# EAGLE board PIRot (EAGLE 9.6.0)
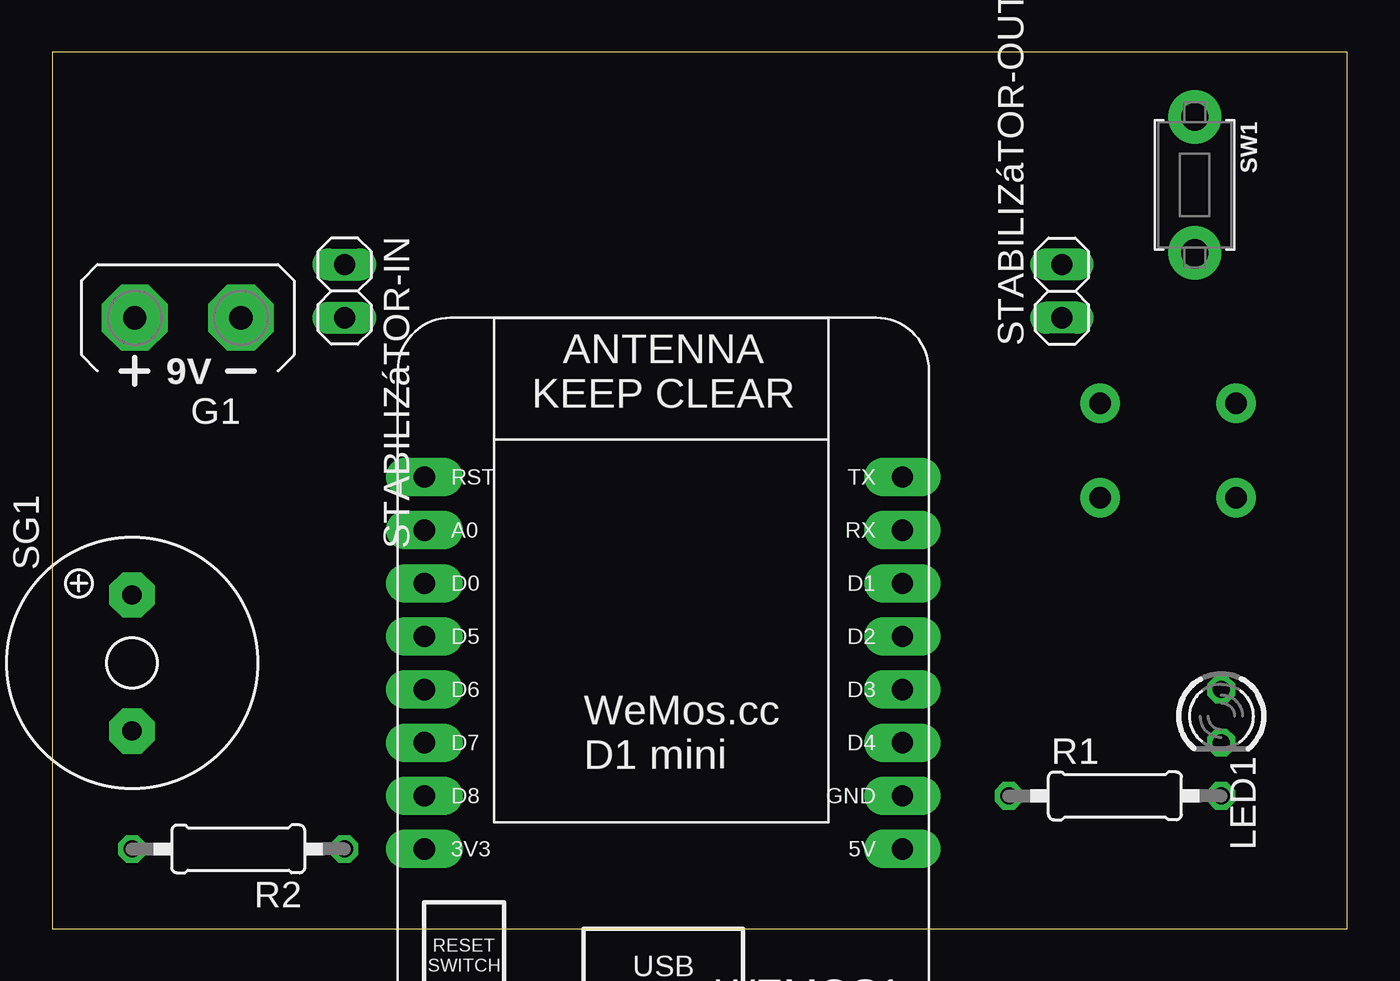
[diagram p0: board, top side]
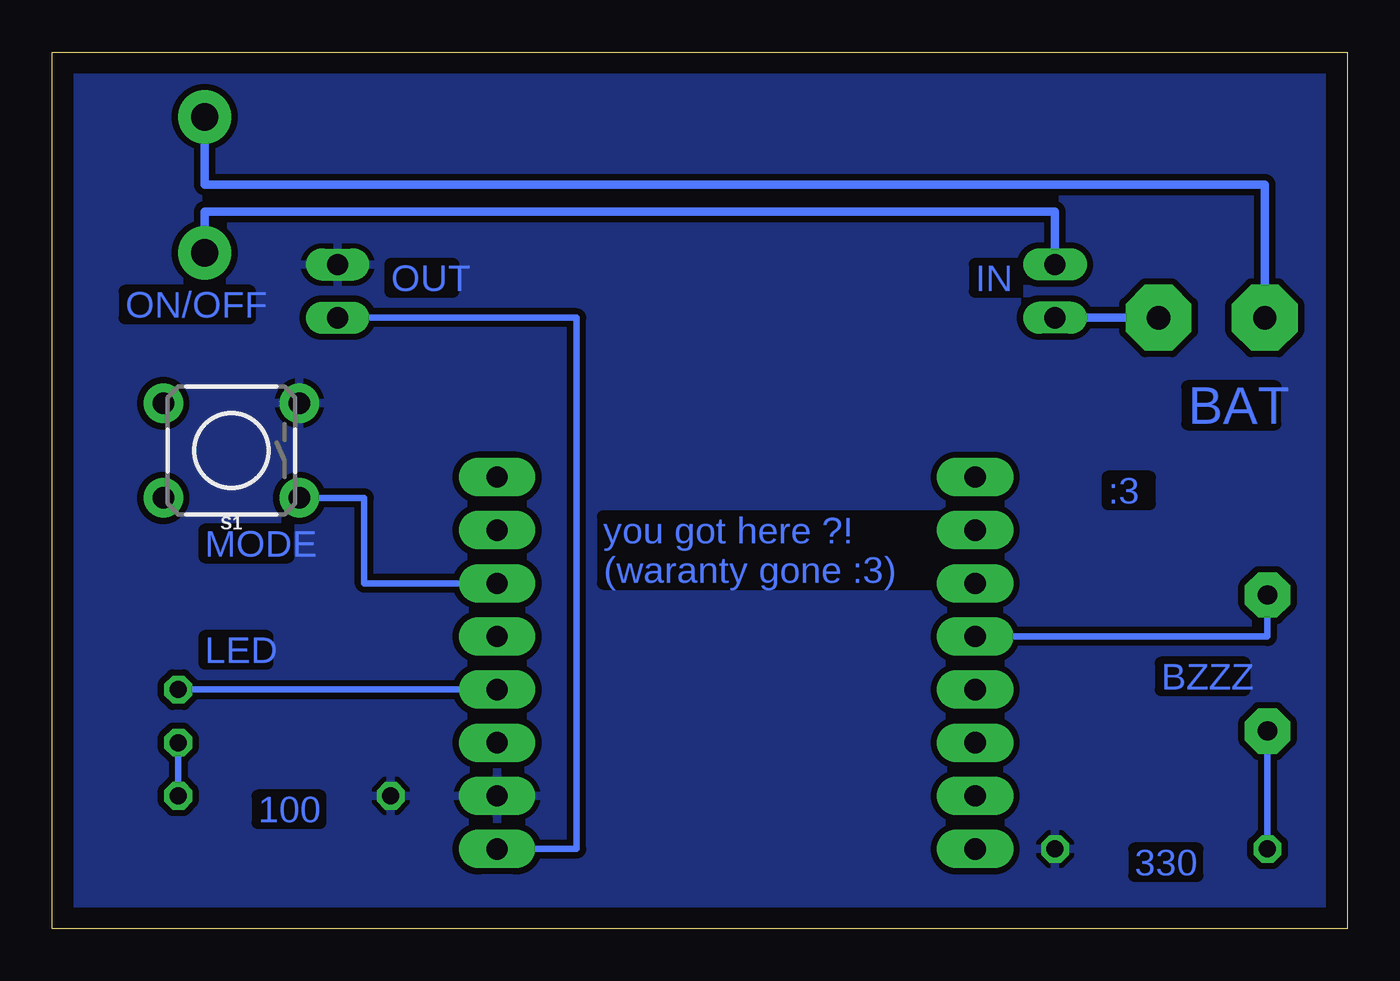
[diagram p1: board, bottom side, seen from below]

Size 61.9 x 41.9 mm. Coordinates in mm from the lower left corner, seen from the top.
Outline: 0,0 61.9,0 61.9,41.9 0,41.9 0,0
Copper layers (1*16): Top 0.035mm / dielectric 1.5mm / Bottom 0.035mm
Design rules "default": minimum track width 6mil, minimum drill 0.35mm, track to track 6mil, track to pad 6mil, pad to pad 6mil, via to via 6mil, smd to smd 6mil, copper to edge 40mil, drill to drill 6mil, minimum pad ring 10mil, minimum via ring 8mil, stop-mask expansion 4mil, vias tented up to drill 0mil, thermal gap 10mil

## Footprints (pad centres in the part's own frame; a part is rotated, then mirrored left to right if it is on the bottom)
AB9V = drill 1.118 pad 3.15 octagon: + 0,2.54; - 0,-2.54
LED3MM = drill 0.813 octagon: A -1.27,0; K 1.27,0
0207/10 = drill 0.813 octagon: 1 -5.08,0; 2 5.08,0
TACTILE_SWITCH_PTH_6.0MM_KIT = drill 1.016 pad 1.88: 1 -3.251,2.261; 2 3.251,2.261; 3 -3.251,-2.261; 4 3.251,-2.261
F/QMBIII = drill 0.914 pad 2.159 octagon: + 3.251,0; - -3.251,0
1X02 = drill 1.016 long: 1 -1.27,0; 2 1.27,0
TACT_PANA-EVQ = drill 1.3 pad 2.54: P$1 -3.25,0; P$2 3.25,0
WEMOS-D1-MINI = drill 1.016 pad 1.829 long: 3V3 -10.16,-10.16; 5V 12.7,-10.16; A0 -10.16,5.08; D0 -10.16,2.54; D1 12.7,2.54; D2 12.7,0; D3 12.7,-2.54; D4 12.7,-5.08; D5 -10.16,0; D6 -10.16,-2.54; D7 -10.16,-5.08; D8 -10.16,-7.62; GND 12.7,-7.62; RESET -10.16,7.62; RX 12.7,5.08; TX 12.7,7.62

## Placement (x,y rotation side)
G1  AB9V  [AB9V]  6.48,29.21 90 top
LED1  [LED3MM]  55.88,10.16 270 top
R1  100R  [0207/10]  50.8,6.35 0 top
R2  330R  [0207/10]  8.89,3.81 180 top
S1  MOMENTARY-SWITCH-SPST-PTH-6.0MM-KIT  [TACTILE_SWITCH_PTH_6.0MM_KIT]  53.34,22.86 180 bottom
SG1  F/QMBIII  [F/QMBIII]  3.81,12.7 90 top
STABILIZáTOR-IN  [1X02]  13.97,30.48 270 top
STABILIZáTOR-OUT  [1X02]  48.26,30.48 90 top
SW1  [TACT_PANA-EVQ]  54.61,35.56 270 top
WEMOS1  [WEMOS-D1-MINI]  27.94,13.97 0 top

## Library data of the parts
G1 = battery
LED1 = led
R1 R2 = eagle-ltspice; SPICEMODEL: NONE; SPICEPREFIX: R
S1 = SparkFun-Switches; PROD_ID: SWCH-08441; SF_SKU: COM-00097
SG1 = buzzer; OC_FARNELL: unknown; OC_NEWARK: unknown
STABILIZáTOR-IN STABILIZáTOR-OUT = Airquality_Sensor
SW1 = adafruit
WEMOS1 = esp8266modules

## Nets
GND: R1.1 R2.1 S1.3 STABILIZáTOR-OUT.2 WEMOS1.GND
N$1: LED1.A WEMOS1.D3
N$2: LED1.K R1.2
N$3: G1.+ SW1.P$1
N$4: STABILIZáTOR-OUT.1 WEMOS1.5V
N$5: SG1.+ WEMOS1.D5
N$6: R2.2 SG1.-
N$7: S1.1 WEMOS1.D1
N$8: G1.- STABILIZáTOR-IN.2
N$11: STABILIZáTOR-IN.1 SW1.P$2

## Tracks (layer width: path | path; a pad name or v marks a point on that pad's centre or on a via)
GND
  pour Bottom (isolate 0.305): 0,0 0,41.91 62.23,41.91 62.23,0
N$1
  Bottom 0.305: LED1.A WEMOS1.D3
N$2
  Bottom 0.305: LED1.K R1.2
N$3
  Bottom 0.406: SW1.P$1 54.61,35.56 3.94,35.56 G1.+
N$4
  Bottom 0.305: WEMOS1.5V 36.83,3.81 36.83,29.21 STABILIZáTOR-OUT.1
N$5
  Bottom 0.305: SG1.+ 3.81,13.97 WEMOS1.D5
N$6
  Bottom 0.305: SG1.- R2.2
N$7
  Bottom 0.305: WEMOS1.D1 46.99,16.51 46.99,20.6 S1.1
N$8
  Bottom 0.406: G1.- STABILIZáTOR-IN.2
N$11
  Bottom 0.406: STABILIZáTOR-IN.1 13.97,34.29 54.61,34.29 SW1.P$2

## Text on the board
Bottom: IN | OUT | ON/OFF | BAT | :3 | MODE | you got here ?! / (waranty gone :3) | LED | BZZZ | 100 | 330